# Altium PCB 飞控板2.PcbDoc
Units mil, origin at the board's own origin, x right, y up, seen from the top; angles counter-clockwise.
Board outline 6000 x 4000 mil, 2 copper layers (Top Layer, Bottom Layer); 61 components, 96 nets, 338 pads, 0 vias.
Unrouted connection lines stored in the file: 181.
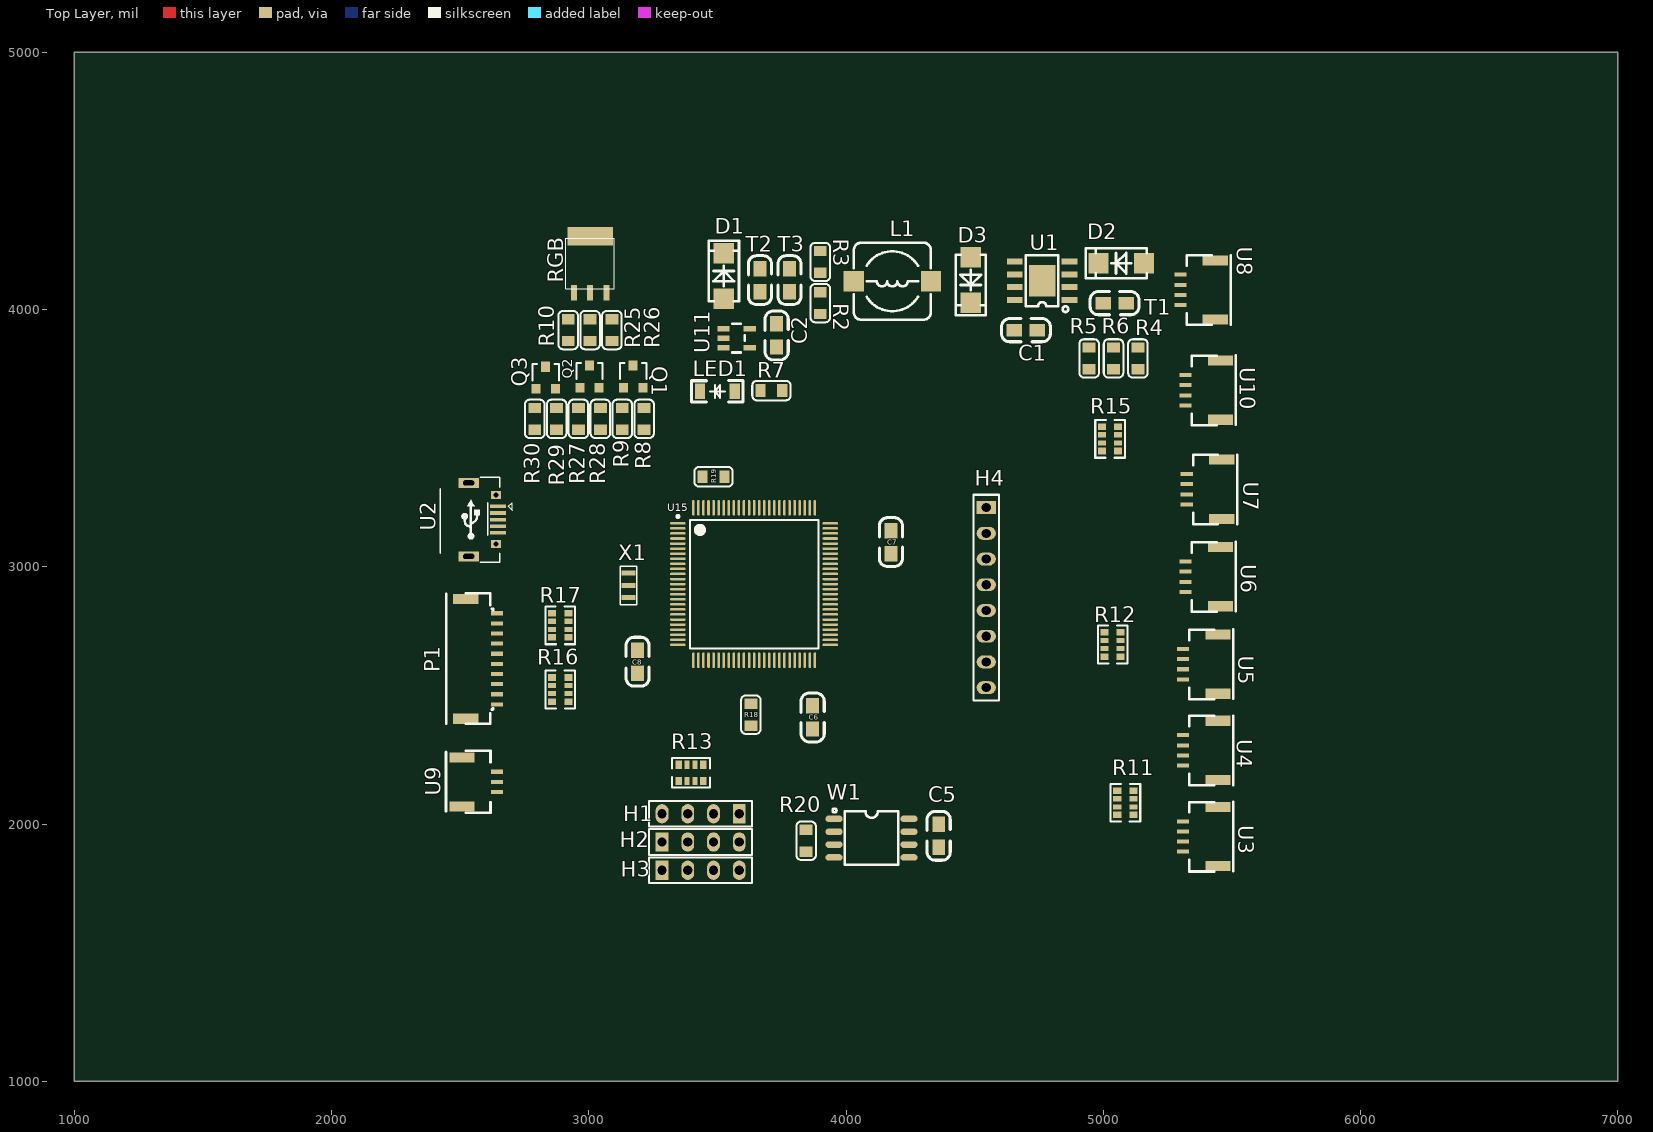
[diagram p0: Top Layer view]
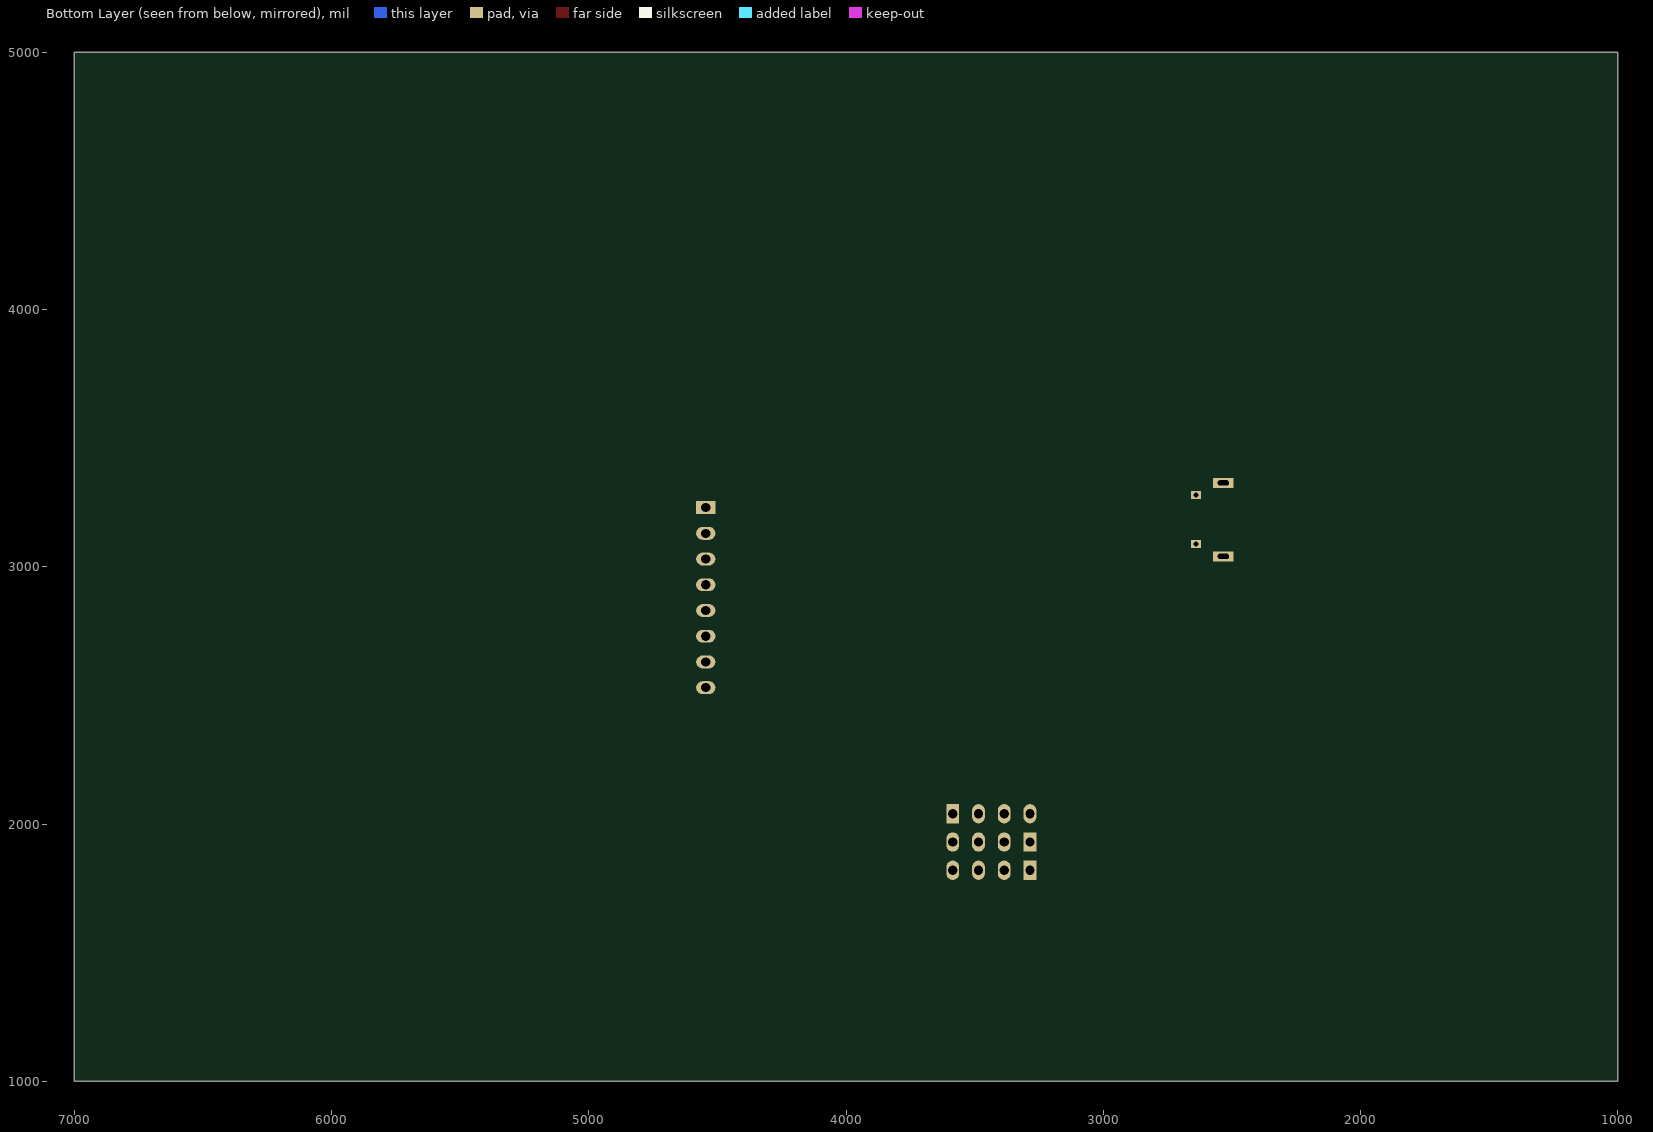
[diagram p1: Bottom Layer view, seen from below]

## Layer stack, top to bottom
Top Layer: signal copper 1.4
Dielectric: dielectric 12.6, FR-4, Dk 4.8
Bottom Layer: signal copper 1.4

## Board outline
1000,1000 7000,1000 7000,5000 1000,5000

## Design rules (kind name [scope] priority, off if disabled: settings)
Clearance Clearance_1 [All] p1: gap=10
Clearance [All] p2: gap=10
PolygonConnect [All] p1: connectstyle=Relief reliefconductorwidth=10 reliefentries=4 polygonreliefangle="90 Angle"
RoutingVias [All] p1: holewidth=28 width=50 viastyle="Through Hole" minholewidth=28 minwidth=50 maxholewidth=28 maxwidth=50
SilkscreenOverComponentPads [All] p1: minsilkscreentomaskgap=10
SolderMaskExpansion [All] p1: expansion=4
Width [All] p1: maxlimit=10 minlimit=10 preferedwidth=10
27 further rules are at their usual default settings.

## Components (designator, comment, footprint, x,y, rotation, side; value= is the part's Value field where it differs from the comment)
C1 "10nf50v" 0805C 4655,3920 r0 top
C2 "0.1uf50v" 0805C 3730,3855 r90 top
C5 "1uf10v" 0805C 4360,1910 r90 top
C6 "0.1uf50v" 0805C 3870,2370 r90 top
C7 "0.1uf50v" 0805C 4175,3140 r270 top
C8 "0.1uf50v" 0805C 3190,2675 r270 top
D1 "1N5819" DO214AC_SMA 3525,4130 r90 top
D2 "1N5819" DO214AC_SMA 5070,4180 r180 top
D3 "1N5819" DO214AC_SMA 4485,4115 r270 top
H1 "Header 4" HDR1X4 3435,2040 r180 top
H2 "Header 4" HDR1X4 3435,1930 r0 top
H3 "Header 4" HDR1X4 3435,1820 r0 top
H4 "Header 8" HDR1X8 4545,2880 r270 top
L1 "CD54-22UH2A" CDRH73 4180,4110 r180 top
LED1 "" LED-1206 3490,3680 r270 top
P1 "SH1.0-10P" SH1.0-10P 2560,2620 r90 top
Q1 "" SI2310 3165,3735 r180 top
Q2 "" SI2310 2995,3735 r180 top
Q3 "" SI2310 2825,3730 r180 top
R2 "50K" 0805R 3900,4025 r90 top
R3 "15K" 0805R 3900,4185 r90 top
R4 "10K" 0805R 5135,3810 r270 top
R5 "1K" 0805R 4945,3810 r90 top
R6 "1K" 0805R 5040,3810 r270 top
R7 "1K" 0805R 3710,3685 r180 top
R8 "10K" 0805R 3215,3575 r90 top
R9 "1K" 0805R 3130,3575 r90 top
R10 "50R" 0805R 2920,3920 r270 top
R11 "1k0603" 1k0603#1 5085,2090 r270 top
R12 "1k0603" 1k0603#2 5035,2690 r90 top
R13 "1k0603" 1k0603#1 3405,2200 r180 top
R15 "1k0603" 1k0603#1 5025,3505 r270 top
R16 "1k0603" 1k0603#2 2890,2530 r270 top
R17 "1k0603" 1k0603#2 2890,2780 r270 top
R18 "10K" 0805R 3630,2425 r270 top
R19 "10K" 0805R 3485,3350 r0 top
R20 "4.3K" 0805R 3845,1935 r270 top
R25 "50R" 0805R 3005,3920 r270 top
R26 "50R" 0805R 3090,3920 r270 top
R27 "1K" 0805R 2960,3575 r90 top
R28 "10K" 0805R 3045,3575 r90 top
R29 "10K" 0805R 2875,3575 r90 top
R30 "1K" 0805R 2790,3575 r90 top
RGB "" RGB_LED 3100,4080 r90 top (schematic designator RGB—_LED)
T1 "100UF25V" 0805C 5000,4025 r0 top
T2 "47UF16V" 0805C 3665,4070 r90 top
T3 "47UF16V" 0805C 3780,4070 r90 top
U1 "TPS5430" TPS5430 4770,4145 r90 top
U2 "ANO-USB" ANO-USB 2545,3180 r270 bottom
U3 "USART1" SH1.0-4P 5420,1955 r270 top
U4 "USART2" SH1.0-4P 5420,2290 r270 top
U5 "USART3" SH1.0-4P 5420,2625 r270 top
U6 "USART4" SH1.0-4P 5430,2965 r270 top
U7 "USART5" SH1.0-4P 5435,3305 r270 top
U8 "" SH1.0-4P 5410,4080 r270 top
U9 "PPM" SH1.0-3P 2575,2145 r270 bottom
U10 "SWD" SH1.0-4P 5430,3690 r270 top
U11 "MIC5219" MIC5219 3570,3875 r270 top
U15 "" STM32F407VGT6= 3635,2915 r0 top
W1 "W25Q32" W25Q32 4110,1940 r270 top
X1 "陶瓷晶振" 陶瓷晶振 3145,2935 r90 top

## Footprints (in the part's own frame and the unit in brackets; to place one, negate y for a bottom-side part, rotate by r counter-clockwise, add the part's x,y. Pads: shape width x height; smd on the part's side, far side on the other; paste and mask are expansions set on the pad)
1k0603#1 [mm]
  rect 0.65x0.8 smd: 1(-1.008,-0.774) 4(1.392,-0.774) 5(1.392,0.826) 8(-1.008,0.826)
  rect 0.5x0.8 smd: 2(-0.208,-0.774) 3(0.592,-0.774) 6(0.592,0.826) 7(-0.208,0.826)
  silkscreen extent -1.68,-1.42 2.06,1.5
1k0603#2 [mm]
  rect 0.65x0.8 smd: 1(-1.008,0.774) 4(1.392,0.774) 5(1.392,-0.826) 8(-1.008,-0.826)
  rect 0.5x0.8 smd: 2(-0.208,0.774) 3(0.592,0.774) 6(0.592,-0.826) 7(-0.208,-0.826)
  silkscreen extent -1.68,-1.5 2.06,1.42
0805C [mil]
  rect 60x50 smd: 1(-0.71,-0.4) 2(89.29,-0.4)
  silkscreen extent -51,-45 139,45, body extent 6,-25 84,25, height 31
0805R [mil]
  rect 40x50 smd: 1(-42.5,0) 2(42.5,0)
  silkscreen extent -75,-38 75,38, body extent -39,-25 39,25, height 22
ANO-USB [mm]
  rect 0.35x1.6 smd far side: 1(-1.385,-2.599) 2(-0.735,-2.599) 3(-0.085,-2.599) 4(0.565,-2.599) 5(1.215,-2.599)
  rect 1x2 hole 0.5 slot 1.1 at 90 deg: 5(-3.71,0.301) 5(3.54,0.301)
  rect 0.8x1 hole 0.5: 5(-2.51,-2.409) 5(2.34,-2.409)
  body extent -4.09,-2.59 3.92,3.01, height 2.8
CDRH73 [mm]
  rect 2x2 smd: 1(-3.81,0) 2(3.81,0)
  silkscreen extent -3.81,-3.81 3.81,3.81, body extent -3.49,-3.65 3.81,3.65, height 3.65
DO214AC_SMA [mm]
  rect 2x2 smd: 1(-2.25,0) 2(2.25,0)
  silkscreen extent -2.5,-1.5 3.5,1.5, body extent -2.33,-1.35 2.27,1.35, height 2.4
HDR1X4 [mm]
  rect 1.27x1.905 hole 0.9: 1(-3.81,0)
  oval 1.27x1.905 hole 0.9: 2(-1.27,0) 3(1.27,0) 4(3.81,0)
  silkscreen extent -5.08,-1.27 5.08,1.27, body extent -4.98,-1.25 5.18,1.25, height 3
HDR1X8 [mm]
  rect 1.27x1.905 hole 0.9: 1(-8.89,0)
  oval 1.27x1.905 hole 0.9: 2(-6.35,0) 3(-3.81,0) 4(-1.27,0) 5(1.27,0) 6(3.81,0) 7(6.35,0) 8(8.89,0)
  silkscreen extent -10.16,-1.27 10.16,1.27, body extent -10.06,-1.25 10.26,1.25, height 8.2
LED-1206 [mil]
  rect 59.05x39.37 smd: 1(-2,77.5) 2(-2,-57.5)
  silkscreen extent -44,-90 40,110, body extent -33,-52 30,74, height 43
MIC5219 [mil]
  rect 21.7x47.2 smd: 1(-51,-46.4) 2(-14,-46.4) 3(23,-46.4) 4(23,55.6) 5(-51,55.6)
  silkscreen extent -70,-12 42,37
RGB_LED [mm]
  rect 1.8x4.5 smd: 1(5.207,2.413)
  rect 1.5x0.6 smd: 2(-0.373,0.8) 4(-0.373,2.4) 6(-0.373,4)
  silkscreen extent 0,0 5,4.8, body extent 0,0 4.95,4.83, height 3
SH1.0-3P [mm]
  rect 1x2.5 smd far side: 0(-2.897,1.728) 0(1.945,1.728)
  rect 0.4x1.2 smd far side: 1(0.525,-1.729) 2(-0.475,-1.729) 3(-1.475,-1.729)
SH1.0-4P [mm]
  rect 0.4x1.2 smd: 1(-1.406,-2.799) 2(-0.406,-2.799) 3(0.594,-2.799) 4(1.594,-2.799)
  rect 1x2.5 smd: 5(-2.827,0.658) 5(3.015,0.658)
  silkscreen extent -3.33,-2.16 3.55,2.18, body extent -2.89,-2.97 3.11,1.99, height 3.14
SH1.0-10P [mm]
  rect 1x2.5 smd: 0(-5.358,0.982) 0(6.484,0.982)
  rect 0.4x1.2 smd: 1(-3.937,-2.099) 2(-2.937,-2.099) 3(-1.937,-2.099) 4(-0.937,-2.099) 5(0.063,-2.099) 6(1.063,-2.099) 7(2.063,-2.099) 8(3.063,-2.099) 9(4.063,-2.099) 10(5.063,-2.099)
  silkscreen extent -5.87,-1.72 7.02,2.88
SI2310 [mm]
  rect 0.9x0.95 smd: 1(0.75,0.976) 2(-1.155,0.976)
  rect 0.9x1 smd: 3(-0.19,-1.208)
  silkscreen extent -1.5,-1.47 1.1,0.15, body extent -1.67,-1.54 1.23,1.26, height 1.3
STM32F407VGT6= [mm]
  oval 1.55x0.25 smd: 1(-7.33,6.449) 2(-7.33,5.949) 3(-7.33,5.449) 4(-7.33,4.949) 5(-7.33,4.449) 6(-7.33,3.949) 7(-7.33,3.449) 8(-7.33,2.949) 9(-7.33,2.449) 10(-7.33,1.949) 11(-7.33,1.449) 12(-7.33,0.949) 13(-7.33,0.449) 14(-7.33,-0.051) 15(-7.33,-0.551) 16(-7.33,-1.051) 17(-7.33,-1.551) 18(-7.33,-2.051) 19(-7.33,-2.551) 20(-7.33,-3.051) 21(-7.33,-3.551) 22(-7.33,-4.051) 23(-7.33,-4.551) 24(-7.33,-5.051) 25(-7.33,-5.551) 51(7.72,-5.551) 52(7.72,-5.051) 53(7.72,-4.551) 54(7.72,-4.051) 55(7.72,-3.551) 56(7.72,-3.051) 57(7.72,-2.551) 58(7.72,-2.051) 59(7.72,-1.551) 60(7.72,-1.051) 61(7.72,-0.551) 62(7.72,-0.051) 63(7.72,0.449) 64(7.72,0.949) 65(7.72,1.449) 66(7.72,1.949) 67(7.72,2.449) 68(7.72,2.949) 69(7.72,3.449) 70(7.72,3.949) 71(7.72,4.449) 72(7.72,4.949) 73(7.72,5.449) 74(7.72,5.949) 75(7.72,6.449)
  oval 0.25x1.55 smd: 26(-5.805,-7.076) 27(-5.305,-7.076) 28(-4.805,-7.076) 29(-4.305,-7.076) 30(-3.805,-7.076) 31(-3.305,-7.076) 32(-2.805,-7.076) 33(-2.305,-7.076) 34(-1.805,-7.076) 35(-1.305,-7.076) 36(-0.805,-7.076) 37(-0.305,-7.076) 38(0.195,-7.076) 39(0.695,-7.076) 40(1.195,-7.076) 41(1.695,-7.076) 42(2.195,-7.076) 43(2.695,-7.076) 44(3.195,-7.076) 45(3.695,-7.076) 46(4.195,-7.076) 47(4.695,-7.076) 48(5.195,-7.076) 49(5.695,-7.076) 50(6.195,-7.076) 76(6.195,7.974) 77(5.695,7.974) 78(5.195,7.974) 79(4.695,7.974) 80(4.195,7.974) 81(3.695,7.974) 82(3.195,7.974) 83(2.695,7.974) 84(2.195,7.974) 85(1.695,7.974) 86(1.195,7.974) 87(0.695,7.974) 88(0.195,7.974) 89(-0.305,7.974) 90(-0.805,7.974) 91(-1.305,7.974) 92(-1.805,7.974) 93(-2.305,7.974) 94(-2.805,7.974) 95(-3.305,7.974) 96(-3.805,7.974) 97(-4.305,7.974) 98(-4.805,7.974) 99(-5.305,7.974) 100(-5.805,7.974)
  silkscreen extent -7.45,-5.9 6.55,7.25
TPS5430 [mm]
  rect 0.6x1.55 smd: 1(-2.747,-2.508) 2(-1.477,-2.508) 3(-0.207,-2.508) 4(1.063,-2.508) 5(1.063,2.892) 6(-0.207,2.892) 7(-1.477,2.892) 8(-2.747,2.892)
  rect 3.1x2.6 smd: 9(-0.842,0.192)
  silkscreen extent -3.93,-2.39 1.66,1.79
W25Q32 [mil]
  oval 25.59x66.86 smd: 1(-80,-156.54) 2(-30,-156.54) 3(20,-156.54) 4(70,-156.54) 5(70,134.81) 6(20,134.81) 7(-30,134.81) 8(-80,134.81)
  silkscreen extent -120,-162 99,93
陶瓷晶振 [mm]
  rect 0.5x1.4 smd: 1(-1.384,-0.24) 2(-0.184,-0.24) 3(1.016,-0.24)
  silkscreen extent -2.08,-1.04 1.72,0.56, body extent -1.78,-0.89 1.42,0.41, height 0.7

## Part data
C1 C2 C5 C6 C7 C8 T1 T2 T3: library part CAP
D1 D2 D3: library part 1N5817-5819SMD
H1 H2 H3: "Header, 4-Pin"
H4: "Header, 8-Pin"
L1: library part INDUCTOR, "INDUCTOR"
P1: library part SH1.0-1
Q1 Q2 Q3: library part SI23
R2 R3 R4 R5 R6 R7 R8 R9 R10 R18 R19 R20 R25 R26 R27 R28 R29 R30: library part Res_0805
R11 R12 R13 R15 R16 R17: library part 1k06
RGB: library part RGB
U1: library part TPS54
U2: library part ANO-U
U3 U4 U5 U6 U7 U8 U9 U10: library part SH1.0-
U11: library part MIC52
U15: library part STM32F407VGT
W1: library part W25Q

## Nets (pads, with @x,y where several pads share a name; then routed paths per layer and width w, separated by ;. In a path a pad name is that pad's centre, name@x,y a point inside that pad or via, vN(x,y) a via of type N, cw(c..) or ccw(c..) an arc to the next point about the centre after c; other vN are vias at no path point)
BOOT1: R18.1 U15.37
GND: C2.1 C5.1 C6.1 C7.1 C8.2 D3.1 H3.1 H3.2 H3.3 H3.4 H4.7 LED1.2 P1.1 R3.2 R5.2 R18.2 R19.1 T1.2 T2.2 T3.2 U1.6 U1.9 U2.5 U3.2 U4.2 U5.2 U6.2 U7.2 U8.3 U8.4 U9.3 U10.3 U11.2 U15.10 U15.20 U15.27 U15.74 U15.99 W1.4 X1.2
LED_1: R9.1 U15.97
LED_2: R27.1 U15.98
LED_3: R30.1 U15.1
NetC1_1: C1.1 D3.2 L1.1 U1.8
NetC1_2: C1.2 U1.1
NetC2_2: C2.2 U11.4
NetC6_2: C6.2 U15.49
NetC7_2: C7.2 U15.73
NetC8_1: C8.1 U15.14
NetD1_1: D1.1 L1.2 R2.1 T2.1 T3.1
NetLED1_1: LED1.1 R7.2
NetQ1_1: Q1.1 R8.1 R9.2
NetQ1_2: Q1.2 R8.2
NetQ1_3: Q1.3 R26.2
NetQ2_1: Q2.1 R27.2 R28.1
NetQ2_2: Q2.2 R28.2
NetQ2_3: Q2.3 R25.2
NetQ3_1: Q3.1 R29.1 R30.2
NetQ3_2: Q3.2 R29.2
NetQ3_3: Q3.3 R10.2
NetR2_2: R2.2 R3.1 U1.4
NetR4_2: R4.2 R5.1 R6.1
NetR10_1: R10.1 RGB.6
NetR19_2: R19.2 U15.94
NetR25_1: R25.1 RGB.4
NetR26_1: R26.1 RGB.2
NetU15_12: U15.12 X1.3
NetU15_13: U15.13 X1.1
OTG_FS_DM: U2.2 U15.70
OTG_FS_DP: U2.3 U15.71
POWER_INPUT: R6.2 U15.34
PPM_IN: P1.3 R16.5 U9.1
PWMIN_2: P1.4 R16.6
PWMIN_3: P1.5 R16.7
PWMIN_4: P1.6 R16.8
PWMIN_5: P1.7 R17.5
PWMIN_6: P1.8 R17.6
PWMIN_7: P1.9 R17.7
PWMIN_8: P1.10 R17.8
PWMOUT_1: H1.1 R13.8
PWMOUT_2: H1.2 R13.7
PWMOUT_3: H1.3 R13.6
PWMOUT_4: H1.4 R13.5
SPI1_CLK: U15.30 W1.6
SPI1_MISO: U15.31 W1.2
SPI1_MOSI: U15.32 W1.5
SPI1_NSS: R20.1 U15.29 W1.1
SPI2_CLK: H4.6 U15.52
SPI2_CS1: H4.3 U15.81
SPI2_CS2: H4.2 U15.78
SPI2_CS3: H4.1 U15.79
SPI2_MISO: H4.4 U15.53
SPI2_MOSI: H4.5 U15.54
SPI2_NSS: U15.51
SWCLK: R15.1 U15.76
SWCLK_I: R15.8 U10.2
SWDIO: R15.2 U15.72
SWDIO_I: R15.7 U10.4
TIM1_CH1: R13.4 U15.40
TIM1_CH2: R13.3 U15.42
TIM1_CH3: R13.2 U15.44
TIM1_CH4: R13.1 U15.45
TIM3_CH1: R16.4 U15.63
TIM3_CH2: R16.3 U15.64
TIM3_CH3: R16.2 U15.35
TIM3_CH4: R16.1 U15.36
TIM4_CH1: R17.4 U15.59
TIM4_CH2: R17.3 U15.60
TIM4_CH3: R17.2 U15.61
TIM4_CH4: R17.1 U15.62
USART1_RX: R11.3 U15.69
USART1_RX_I: R11.6 U3.4
USART1_TX: R11.4 U15.68
USART1_TX_I: R11.5 U3.3
USART2_RX: R11.1 U15.87
USART2_RX_I: R11.8 U4.4
USART2_TX: R11.2 U15.86
USART2_TX_I: R11.7 U4.3
USART3_RX: R12.1 U15.48
USART3_RX_I: R12.8 U5.4
USART3_TX: R12.2 U15.47
USART3_TX_I: R12.7 U5.3
USART4_RX: R12.3 U15.24
USART4_RX_I: R12.6 U6.4
USART4_TX: R12.4 U15.23
USART4_TX_I: R12.5 U6.3
USART5_RX: R15.3 U15.83
USART5_RX_I: R15.6 U7.4
USART5_TX: R15.4 U15.80
USART5_TX_I: R15.5 U7.3
VCC_2S~6S: D2.1 R4.1 U8.1 U8.2
VCC_3.3V: C5.2 R7.1 R20.2 U10.1 U11.5 U15.6 U15.11 U15.19 U15.21 U15.22 U15.28 U15.50 U15.75 U15.100 W1.3 W1.7 W1.8
VCC_5.0V: D1.2 H2.1 H2.2 H2.3 H2.4 H4.8 P1.2 RGB.1 U2.1 U3.1 U5.1 U6.1 U7.1 U9.2 U11.1 U11.3
VCC_IN: D2.2 T1.1 U1.7
pads on no net: P1.0 U1.2 U1.3 U1.5 U2.4 U3.5 U4.1 U4.5 U5.5 U6.5 U7.5 U8.5 U9.0 U10.5 U15.2 U15.3 U15.4 U15.5 U15.7 U15.8 U15.9 U15.15 U15.16 U15.17 U15.18 U15.25 U15.26 U15.33 U15.38 U15.39 U15.41 U15.43 U15.46 U15.55 U15.56 U15.57 U15.58 U15.65 U15.66 U15.67 U15.77 U15.82 U15.84 U15.85 U15.88 U15.89 U15.90 U15.91 U15.92 U15.93 U15.95 U15.96